# Altium PCB Final_PDC.PcbDoc (part 2 of 4)
Units mil, origin at the board's own origin, x right, y up, seen from the top; angles counter-clockwise.
Board outline 5200.04 x 5000 mil, 4 copper layers (Top Layer, Signal Layer 1, Signal Layer 2, Bottom Layer), stack 30.634 mil thick; 172 components, 174 nets, 838 pads, 925 vias.
Unrouted connection lines stored in the file: 134.
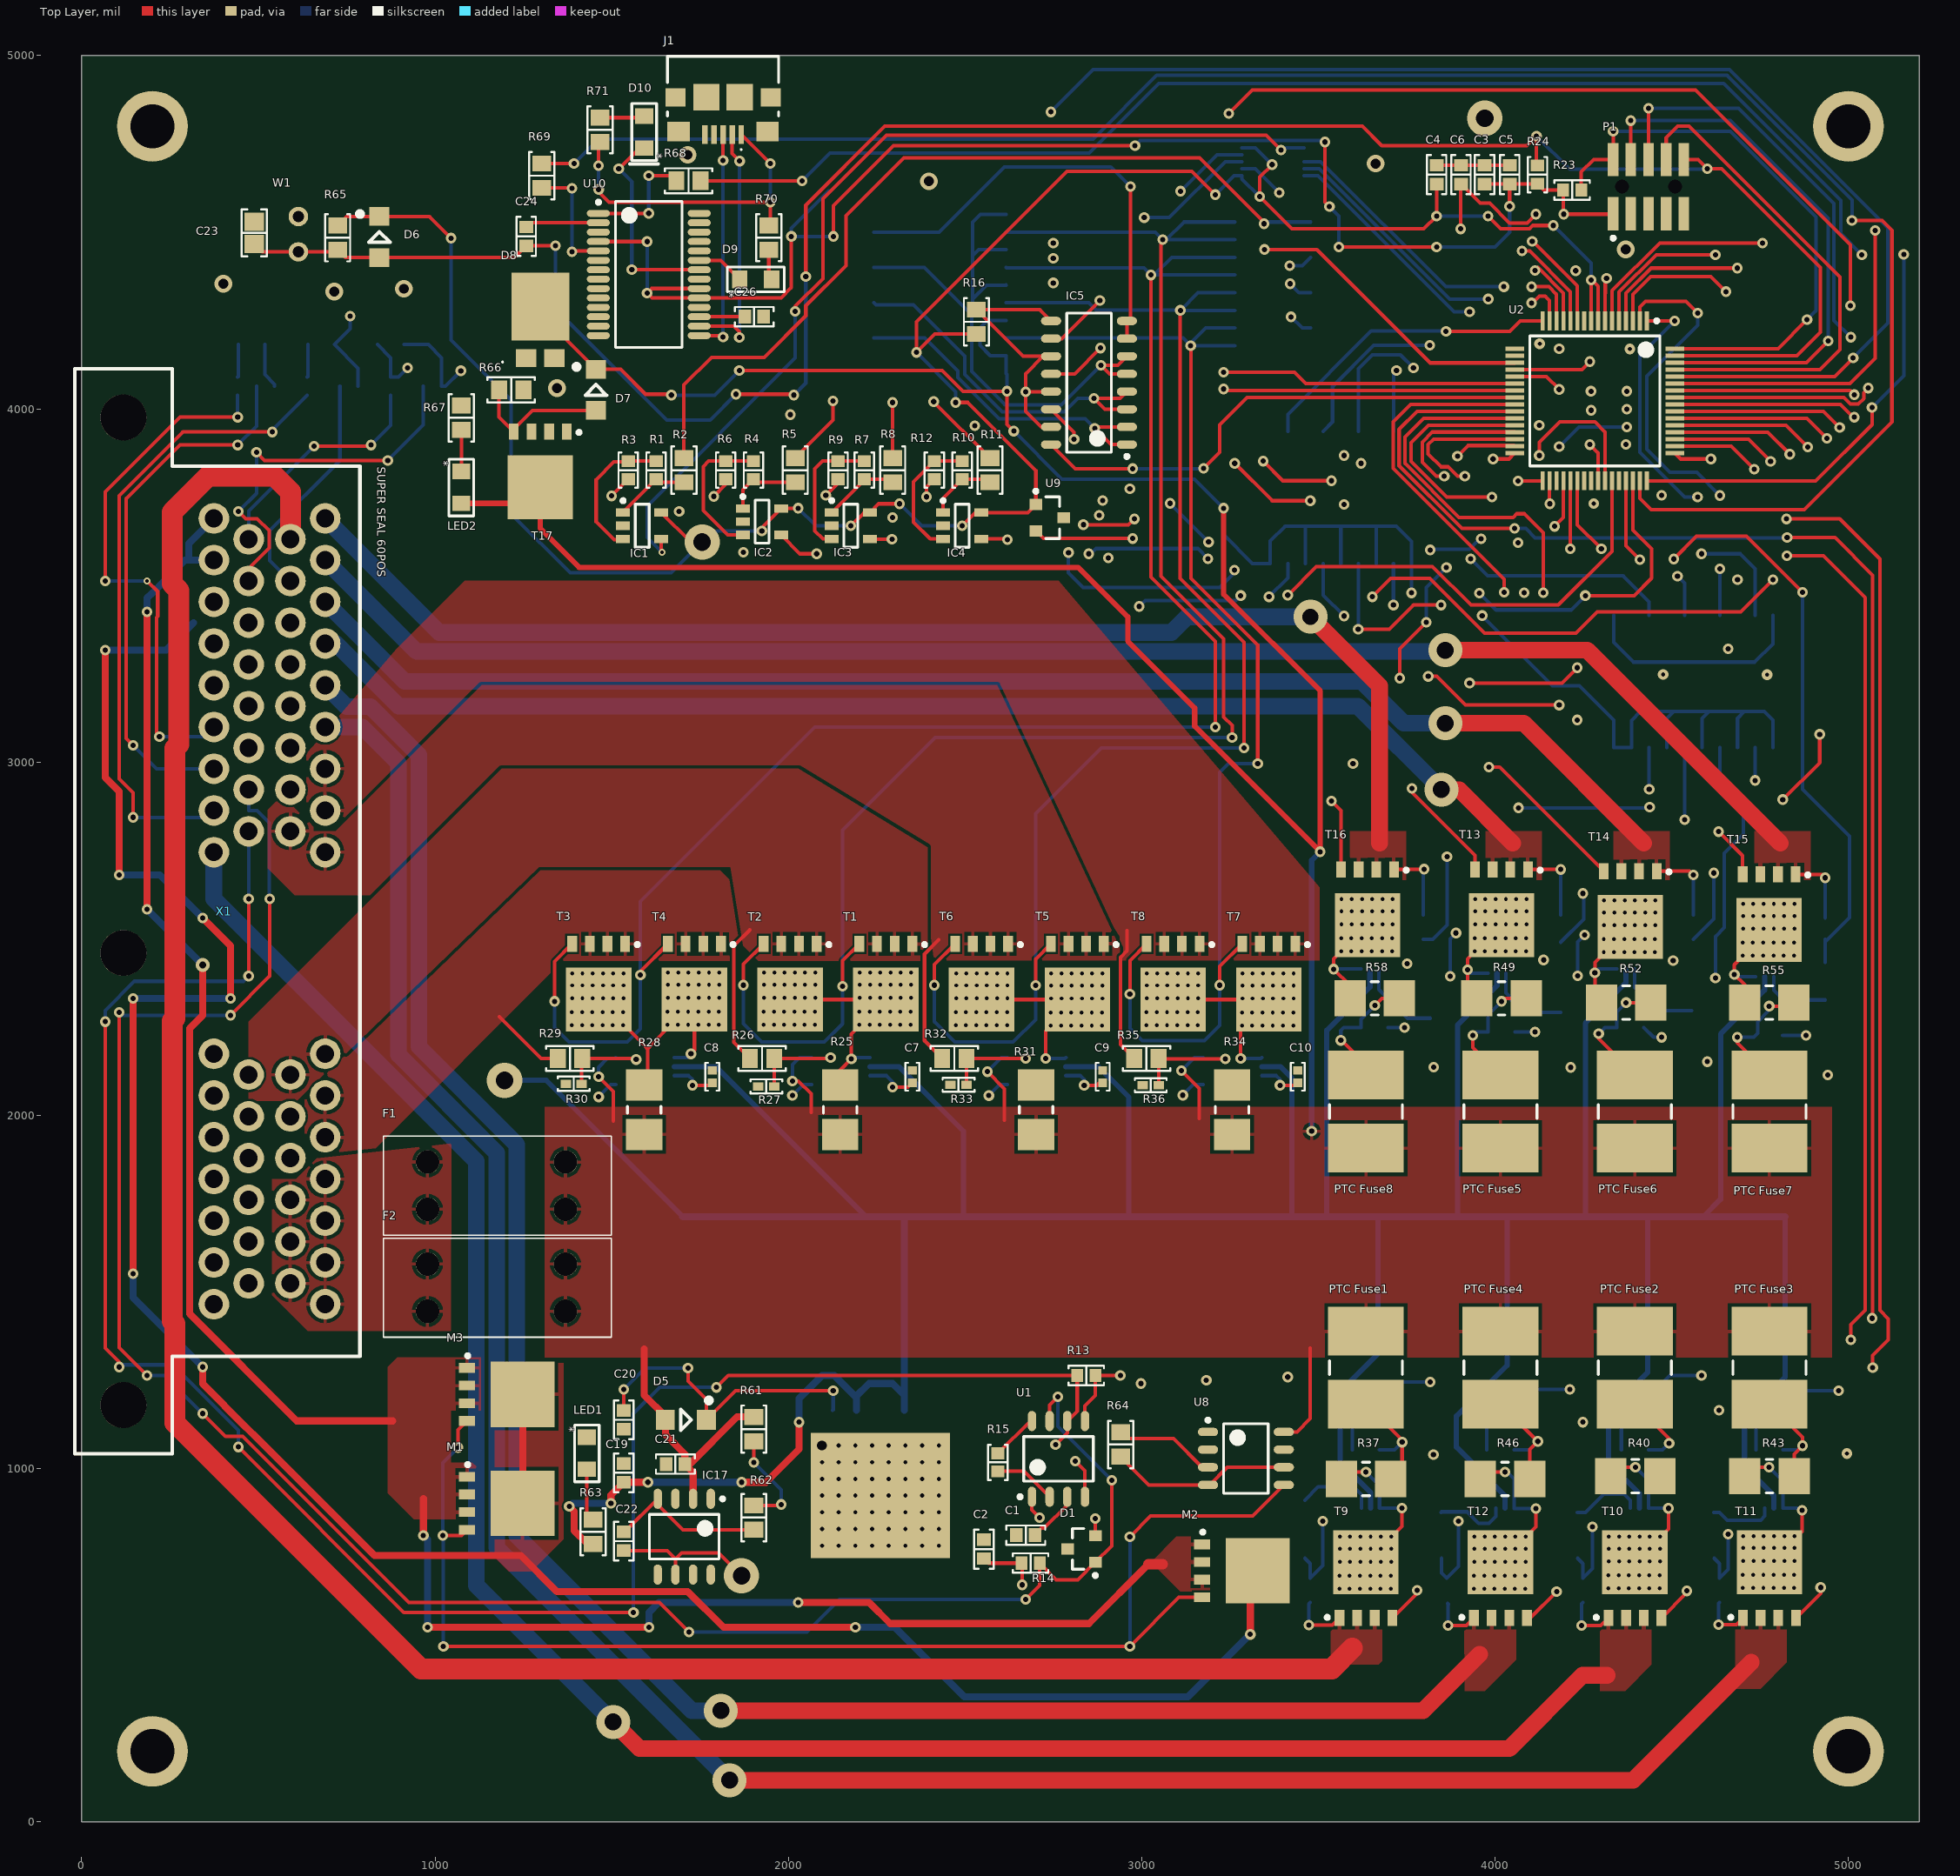
[diagram p0: Top Layer view]

## Via types
v1: diameter 24, hole 11, Top Layer to Bottom Layer, 480 vias
v2: diameter 30, hole 15, Top Layer to Bottom Layer, 416 vias
v3: diameter 50, hole 28, Top Layer to Bottom Layer, 9 vias
v4: diameter 30, hole 12, Top Layer to Bottom Layer, 6 vias
v5: diameter 96, hole 48, Top Layer to Bottom Layer, 6 vias
v6: diameter 100, hole 50, Top Layer to Bottom Layer, 4 vias
v7: diameter 20, hole 10, Top Layer to Bottom Layer, 2 vias
v8: diameter 96, hole 46, Top Layer to Bottom Layer, 1 vias
v9: diameter 40, hole 20, Top Layer to Bottom Layer, 1 vias

## Nets (pads, with @x,y where several pads share a name; then routed paths per layer and width w, separated by ;. In a path a pad name is that pad's centre, name@x,y a point inside that pad or via, vN(x,y) a via of type N, cw(c..) or ccw(c..) an arc to the next point about the centre after c; other vN are vias at no path point) (continued)
5VREF: (continued)
  Signal Layer 1 w10: v2(4115.42,4551.13) 4115.42,4527.99 4212.63,4430.78 4253.9,4430.78 v2(4315.4,4369.27)
  Signal Layer 1 w40: v6(1867.42,697.18) 2458.19,106.42 4574.63,106.42 5118.11,649.9 5118.11,4272.03 4487.59,4902.56 4048.38,4902.56 3970.45,4824.63 v6(3970.45,4822.49)
  Signal Layer 2 w10: v2(3902.26,4509.41) 3903.39,4510.53 3903.39,4757.57 3970.45,4824.63 v6(3970.45,4822.49)